# EAGLE board Orbiter_PowerSupply_V1 (EAGLE 9.5.2)

Size 160 x 100 mm. Coordinates in mm from the lower left corner, seen from the top.
Outline: 0,0 160,0 160,100 0,100 0,0
Copper layers (1*16): Top 0.035mm / dielectric 1.5mm / Bottom 0.035mm
Design rules "default": minimum track width 6mil, minimum drill 0.35mm, track to track 6mil, track to pad 6mil, pad to pad 6mil, via to via 6mil, smd to smd 6mil, copper to edge 40mil, drill to drill 6mil, minimum pad ring 10mil, minimum via ring 8mil, stop-mask expansion 4mil, vias tented up to drill 0mil, thermal gap 10mil

## Footprints (pad centres in the part's own frame; a part is rotated, then mirrored left to right if it is on the bottom)
W237-103 = drill 1.194 long: 1 -5,-1.29; 2 0,-1.29; 3 5,-1.29
ELECTROLYTIC_16MM = drill 0.9 square: + -3.75,0; - 3.75,0
C5MM = drill 0.813 pad 1.6 octagon: 1 -1.27,0; 2 3.81,0
C2.5MM = drill 0.813 pad 1.6 octagon: 1 -1.27,0; 2 1.27,0
SOD323-R = smd 0.762 x 0.6: A 1.1,0; C -1.1,0
78XXS_ = drill 1.499 pad 1.93 long: GND 0,-2.54; IN -2.54,-2.54; OUT 2.54,-2.54
79XXS = drill 1.016 long: GND -2.54,-2.54; IN 0,-2.54; OUT 2.54,-2.54
SIL_RECTIFER = drill 2.4 square: + 0,0; - 25.6,0; AC1 10.2,0; AC2 17.9,0
PRINTTRAFO_30-600-LPI = drill 1.016 pad 2.54: 1 7.62,7.62; 2 7.62,20.32; 3 7.62,45.72; 4 7.62,33.02; 5 58.92,7.62; 6 58.92,20.32; 7 58.92,45.72; 8 58.92,33.02

## Placement (x,y rotation side)
ANALOG_SUPPLY  Analog_Supply  [W237-103]  -73.66,71.12 0 top  (outside the outline)
C1  4700µF  [ELECTROLYTIC_16MM]  -21.59,71.12 0 top  (outside the outline)
C2  4700µF  [ELECTROLYTIC_16MM]  -38.1,71.12 0 top  (outside the outline)
C4  0,3 µF  [C5MM]  -76.2,86.36 0 top  (outside the outline)
C5  0,3 µF  [C5MM]  -83.82,86.36 0 top  (outside the outline)
C9  100nF  [C2.5MM]  -111.76,86.36 0 top  (outside the outline)
C10  100nF  [C2.5MM]  -15.24,96.52 0 top  (outside the outline)
C22  10nF  [C2.5MM]  -91.44,96.52 0 top  (outside the outline)
C23  10nF  [C2.5MM]  -97.79,96.52 0 top  (outside the outline)
C24  10nF  [C2.5MM]  -104.14,96.52 0 top  (outside the outline)
C25  10nF  [C2.5MM]  -110.49,96.52 0 top  (outside the outline)
D1  4148_SOD323  [SOD323-R]  -24.13,111.76 0 top  (outside the outline)
D2  4148_SOD323  [SOD323-R]  -38.1,111.76 0 top  (outside the outline)
INPUT  Mains Supply  [W237-103]  -106.68,71.12 0 top  (outside the outline)
U4  7815  [78XXS_]  -53.34,90.17 0 top  (outside the outline)
U5  7915  [79XXS]  -64.77,90.17 0 top  (outside the outline)
U$1  GLEICHRICHTER  [SIL_RECTIFER]  -41.91,105.41 0 top  (outside the outline)
U$2  [PRINTTRAFO_30-600-LPI]  2.54,2.54 0 top

## Library data of the parts
ANALOG_SUPPLY INPUT = C_Sager_Bibliothek; MPN: 237-103; OC_FARNELL: unknown; OC_NEWARK: 18M7116
C1 C2 C4 C5 C9 C10 C22-C25 D1 D2 U4 U5 U$1 U$2 = C_Sager_Bibliothek

## Nets
+15V: ANALOG_SUPPLY.3 C9.1 D1.A U4.OUT
-15V: ANALOG_SUPPLY.1 C10.2 D2.C U5.OUT
A_GND: ANALOG_SUPPLY.2 C1.- C2.+ C4.2 C5.1 C9.2 C10.1 U4.GND U5.GND U$2.6 U$2.8
N$1: INPUT.3 U$2.3
N$2: INPUT.2 U$2.1
N$3: C23.1 C24.2 U$1.AC1
N$4: C1.+ C4.1 C24.1 C25.1 D1.C U4.IN U$1.+ U$2.7
N$5: C22.1 C25.2 U$1.AC2 U$2.5
N$12: C2.- C5.2 C22.2 C23.2 D2.A U5.IN U$1.-

## Tracks (layer width: path | path; a pad name or v marks a point on that pad's centre or on a via)
+15V  (3 unrouted)
-15V  (3 unrouted)
A_GND  (10 unrouted)
N$1  (1 unrouted)
N$2  (1 unrouted)
N$3  (2 unrouted)
N$4  (7 unrouted)
N$5  (3 unrouted)
N$12  (6 unrouted)